# Altium PCB Alsoran PCB-20180114-version2.PcbDoc (part 4 of 4)
Units mil, origin at the board's own origin, x right, y up, seen from the top; angles counter-clockwise.
Board outline 15223.67 x 4104.31 mil, 2 copper layers (Top Layer, Bottom Layer); 293 components, 222 nets, 1561 pads, 240 vias.
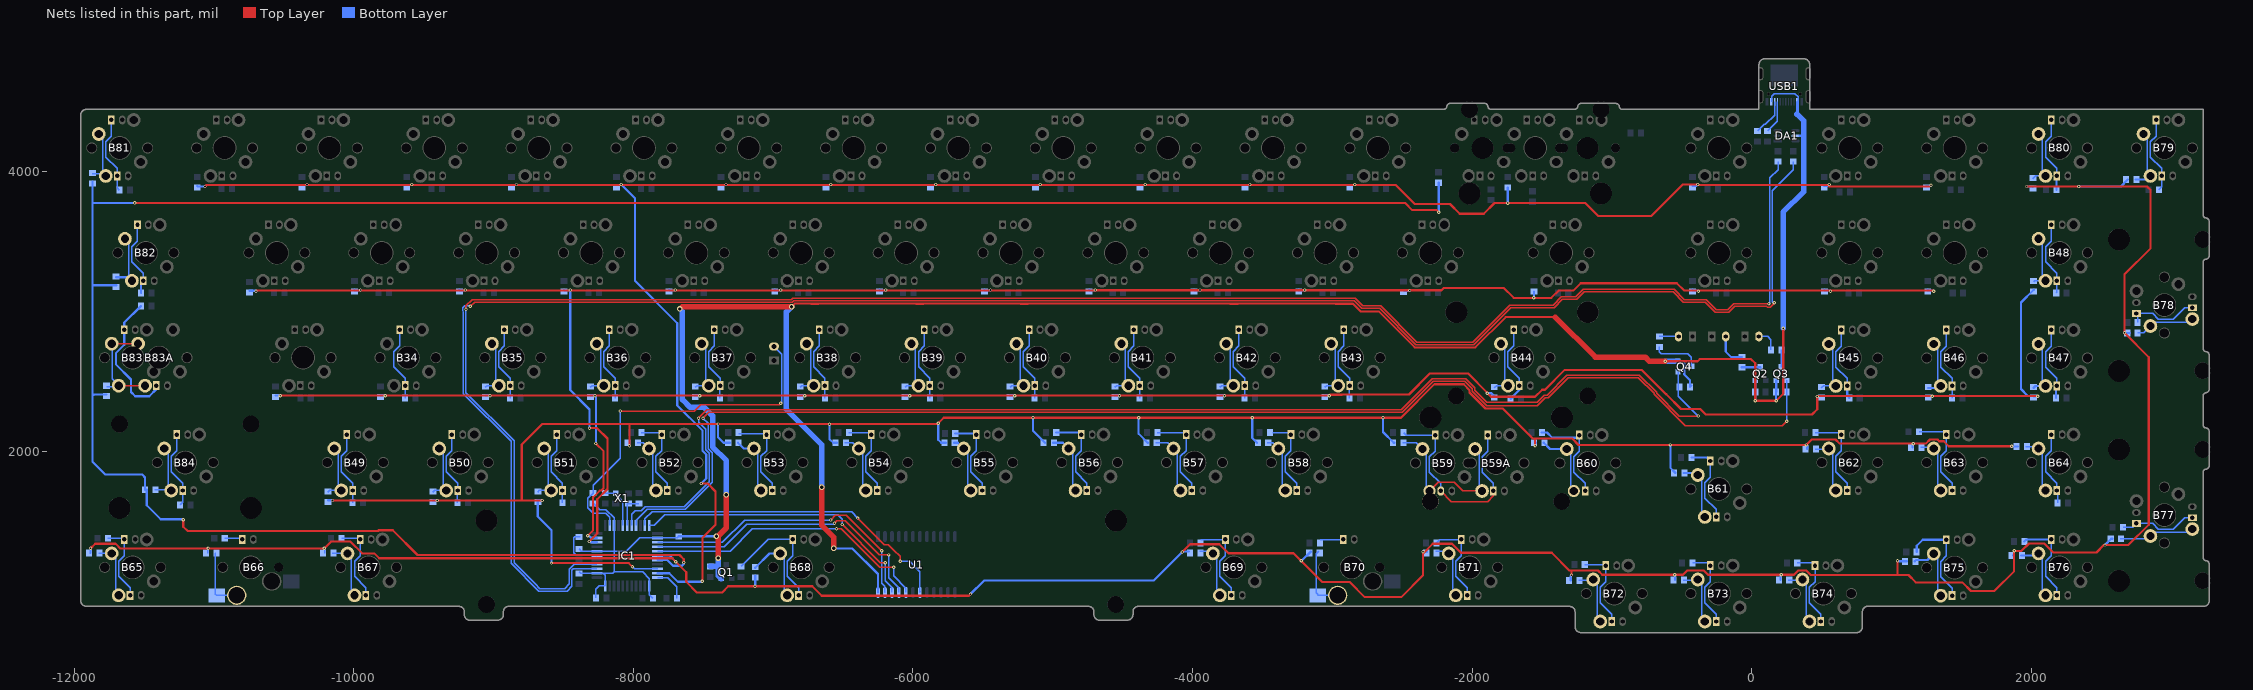
[diagram p4: the nets of this part, all layers, seen from the top]

## Via types
v1: diameter 23.62, hole 11.81, Top Layer to Bottom Layer, 150 vias
v2: diameter 27.56, hole 19.68, Top Layer to Bottom Layer, 63 vias
v3: diameter 39.37, hole 23.62, Top Layer to Bottom Layer, 12 vias
v4: diameter 24.41, hole 11.81, Top Layer to Bottom Layer, tented both sides, 10 vias
v5: diameter 23.62, hole 11.81, Top Layer to Bottom Layer, tented both sides, 3 vias
v6: diameter 31.5, hole 19.68, Top Layer to Bottom Layer, 2 vias

## Nets (pads, with @x,y where several pads share a name; then routed paths per layer and width w, separated by ;. In a path a pad name is that pad's centre, name@x,y a point inside that pad or via, vN(x,y) a via of type N, cw(c..) or ccw(c..) an arc to the next point about the centre after c; other vN are vias at no path point) (continued)
NetB34_3: B34.3 R42.2 | length 540.2
  Bottom Layer w10: B34.3@-9671.81,2869.29 -9671.81,2752.99 -9712.2,2712.6 -9712.2,2604.33 -9630.75,2522.87 B34.3@-9630.75,2469.29 -9631.5,2468.54 R42.2@-9631.5,2379.92
NetB35_2: B35.2 D35.1 | length 422
  Bottom Layer w10: D35.1@-9057.52,2456.69 -9044.92,2469.29 B35.2@-8961.42,2469.29 -8983.46,2491.34 -8983.46,2741.34 B35.2@-9011.42,2769.29
NetB35_3: B35.3 R43.2 | length 540.2
  Bottom Layer w10: B35.3@-8921.42,2869.29 -8921.42,2752.99 -8961.81,2712.6 -8961.81,2604.33 -8880.35,2522.87 B35.3@-8880.35,2469.29 -8881.1,2468.54 R43.2@-8881.1,2379.92
NetB36_2: B36.2 D36.1 | length 422
  Bottom Layer w10: D36.1@-8307.13,2456.69 -8294.53,2469.29 B36.2@-8211.02,2469.29 -8233.07,2491.34 -8233.07,2741.34 B36.2@-8261.02,2769.29
NetB36_3: B36.3 R44.2 | length 540.2
  Bottom Layer w10: B36.3@-8171.02,2869.29 -8171.02,2752.99 -8211.42,2712.6 -8211.42,2604.33 -8129.96,2522.87 B36.3@-8129.96,2469.29 -8130.71,2468.54 R44.2@-8130.71,2379.92
NetB37_2: B37.2 D37.1 | length 422
  Bottom Layer w10: D37.1@-7556.73,2456.69 -7544.14,2469.29 B37.2@-7460.63,2469.29 -7482.68,2491.34 -7482.68,2741.34 B37.2@-7510.63,2769.29
NetB37_3: B37.3 R45.2 | length 540.2
  Bottom Layer w10: B37.3@-7420.63,2869.29 -7420.63,2752.99 -7461.02,2712.6 -7461.02,2604.33 -7379.57,2522.87 B37.3@-7379.57,2469.29 -7380.31,2468.54 R45.2@-7380.31,2379.92
NetB38_2: B38.2 D38.1 | length 422
  Bottom Layer w10: D38.1@-6806.34,2456.69 -6793.74,2469.29 B38.2@-6710.24,2469.29 -6732.28,2491.34 -6732.28,2741.34 B38.2@-6760.24,2769.29
NetB38_3: B38.3 R46.2 | length 540.2
  Bottom Layer w10: B38.3@-6670.24,2869.29 -6670.24,2752.99 -6710.63,2712.6 -6710.63,2604.33 -6629.17,2522.87 B38.3@-6629.17,2469.29 -6629.92,2468.54 R46.2@-6629.92,2379.92
NetB39_2: B39.2 D39.1 | length 422
  Bottom Layer w10: D39.1@-6055.95,2456.69 -6043.35,2469.29 B39.2@-5959.84,2469.29 -5981.89,2491.34 -5981.89,2741.34 B39.2@-6009.84,2769.29
NetB39_3: B39.3 R47.2 | length 540.2
  Bottom Layer w10: B39.3@-5919.84,2869.29 -5919.84,2752.99 -5960.24,2712.6 -5960.24,2604.33 -5878.78,2522.87 B39.3@-5878.78,2469.29 -5879.53,2468.54 R47.2@-5879.53,2379.92
NetB40_2: B40.2 D40.1 | length 422
  Bottom Layer w10: D40.1@-5305.55,2456.69 -5292.95,2469.29 B40.2@-5209.45,2469.29 -5231.5,2491.34 -5231.5,2741.34 B40.2@-5259.45,2769.29
NetB40_3: B40.3 R48.2 | length 540.2
  Bottom Layer w10: B40.3@-5169.45,2869.29 -5169.45,2752.99 -5209.84,2712.6 -5209.84,2604.33 -5128.39,2522.87 B40.3@-5128.39,2469.29 -5129.13,2468.54 R48.2@-5129.13,2379.92
NetB41_2: B41.2 D41.1 | length 422
  Bottom Layer w10: D41.1@-4555.16,2456.69 -4542.56,2469.29 B41.2@-4459.06,2469.29 -4481.1,2491.34 -4481.1,2741.34 B41.2@-4509.06,2769.29
NetB41_3: B41.3 R49.2 | length 540.2
  Bottom Layer w10: B41.3@-4419.06,2869.29 -4419.06,2752.99 -4459.45,2712.6 -4459.45,2604.33 -4377.99,2522.87 B41.3@-4377.99,2469.29 -4378.74,2468.54 R49.2@-4378.74,2379.92
NetB42_2: B42.2 D42.1 | length 422
  Bottom Layer w10: D42.1@-3804.77,2456.69 -3792.17,2469.29 B42.2@-3708.66,2469.29 -3730.71,2491.34 -3730.71,2741.34 B42.2@-3758.66,2769.29
NetB42_3: B42.3 R50.2 | length 540.2
  Bottom Layer w10: B42.3@-3668.66,2869.29 -3668.66,2752.99 -3709.06,2712.6 -3709.06,2604.33 -3627.6,2522.87 B42.3@-3627.6,2469.29 -3628.35,2468.54 R50.2@-3628.35,2379.92
NetB43_2: B43.2 D43.1 | length 422
  Bottom Layer w10: D43.1@-3054.37,2456.69 -3041.77,2469.29 B43.2@-2958.27,2469.29 -2980.31,2491.34 -2980.31,2741.34 B43.2@-3008.27,2769.29
NetB43_3: B43.3 R51.2 | length 540.2
  Bottom Layer w10: B43.3@-2918.27,2869.29 -2918.27,2752.99 -2958.66,2712.6 -2958.66,2604.33 -2877.2,2522.87 B43.3@-2877.2,2469.29 -2877.95,2468.54 R51.2@-2877.95,2379.92
NetB44_2: B44.2 D44.1 | length 426.4
  Bottom Layer w10: D44.1@-1842.52,2452.76 -1825.98,2469.29 B44.2@-1743.7,2469.29 -1765.75,2491.34 -1765.75,2741.34 B44.2@-1793.7,2769.29
NetB44_3: B44.3 R52.2 | length 572.1
  Bottom Layer w10: B44.3@-1703.7,2869.29 -1703.7,2752.99 -1744.09,2712.6 -1744.09,2604.33 -1662.64,2522.87 B44.3@-1662.64,2469.29
  Bottom Layer w15.75: R52.2@-1726.38,2374.02 -1662.64,2437.76 B44.3@-1662.64,2469.29
NetB45_2: B45.2 D45.1 | length 429.5
  Bottom Layer w10: D45.1@498.03,2452.76 512.6,2467.32 B45.2@600.79,2467.32 578.74,2489.37 578.74,2739.37 B45.2@550.79,2767.32
NetB45_3: B45.3 R53.2 | length 542.1
  Bottom Layer w10: B45.3@640.79,2867.32 640.79,2751.02 600.39,2710.63 600.39,2602.36 681.85,2520.91 B45.3@681.85,2467.32
  Bottom Layer w15.75: B45.3@681.85,2467.32 681.85,2396.89 R53.2@696.85,2381.89
NetB46_2: B46.2 D46.1 | length 415.7
  Bottom Layer w10: B46.2@1300.79,2767.32 1328.74,2739.37 1328.74,2489.37 B46.2@1350.79,2467.32
  Bottom Layer w15.75: D46.1@1261.81,2452.76 1336.22,2452.76 B46.2@1350.79,2467.32
NetB46_3: B46.3 R54.2 | length 536.2
  Bottom Layer w10: B46.3@1390.79,2867.32 1390.79,2751.02 1350.39,2710.63 1350.39,2602.36 1431.85,2520.91 B46.3@1431.85,2467.32 1431.85,2382.64 R54.2@1431.1,2381.89
NetB47_2: B47.2 D47.1 | length 413.8
  Bottom Layer w10: B47.2@2050.79,2767.32 2078.74,2739.37 2078.74,2489.37 B47.2@2100.79,2467.32
  Bottom Layer w15.75: D47.1@2013.78,2452.76 2028.35,2467.32 B47.2@2100.79,2467.32
NetB47_3: B47.3 R55.2 | length 538.7
  Bottom Layer w10: B47.3@2140.79,2867.32 2140.79,2751.02 2100.39,2710.63 2100.39,2602.36 2181.85,2520.91 B47.3@2181.85,2467.32
  Bottom Layer w15.75: R55.2@2175.2,2381.89 2175.2,2460.67 B47.3@2181.85,2467.32
NetB48_2: B48.2 D48.1 | length 408.7
  Bottom Layer w10: D48.1@2015.75,3212.22 2022.82,3219.29 B48.2@2100.79,3219.29 2078.74,3241.34 2078.74,3491.34 B48.2@2050.79,3519.29
NetB48_3: B48.3 R56.2 | length 539.8
  Bottom Layer w10: B48.3@2140.79,3619.29 2140.79,3502.99 2100.39,3462.6 2100.39,3354.33 2181.85,3272.87 B48.3@2181.85,3219.29 2181.85,3136.58 R56.2@2177.17,3131.89
NetB49_2: B49.2 D49.1 | length 422
  Bottom Layer w10: D49.1@-10184.29,1706.69 -10171.69,1719.29 B49.2@-10088.19,1719.29 -10110.24,1741.34 -10110.24,1991.34 B49.2@-10138.19,2019.29
NetB49_3: B49.3 R57.2 | length 540.2
  Bottom Layer w10: B49.3@-10048.19,2119.29 -10048.19,2002.99 -10088.58,1962.6 -10088.58,1854.33 -10007.13,1772.87 B49.3@-10007.13,1719.29 -10007.87,1718.54 R57.2@-10007.87,1629.92
NetB50_2: B50.2 D50.1 | length 422
  Bottom Layer w10: D50.1@-9434.07,1706.69 -9421.48,1719.29 B50.2@-9337.97,1719.29 -9360.02,1741.34 -9360.02,1991.34 B50.2@-9387.97,2019.29
NetB50_3: B50.3 R58.2 | length 540.2
  Bottom Layer w10: B50.3@-9297.97,2119.29 -9297.97,2002.99 -9338.36,1962.6 -9338.36,1854.33 -9256.91,1772.87 B50.3@-9256.91,1719.29 -9257.66,1718.54 R58.2@-9257.66,1629.92
NetB51_2: B51.2 D51.1 | length 422
  Bottom Layer w10: D51.1@-8683.86,1706.69 -8671.26,1719.29 B51.2@-8587.75,1719.29 -8609.8,1741.34 -8609.8,1991.34 B51.2@-8637.75,2019.29
NetB51_3: B51.3 R59.2 | length 540.2
  Bottom Layer w10: B51.3@-8547.75,2119.29 -8547.75,2002.99 -8588.15,1962.6 -8588.15,1854.33 -8506.69,1772.87 B51.3@-8506.69,1719.29 -8507.44,1718.54 R59.2@-8507.44,1629.92
NetB52_2: B52.2 D52.1 | length 391.7
  Bottom Layer w10: D52.1@-7972.44,2061.02 -7929.27,2061.02 B52.2@-7887.53,2019.29 -7859.58,1991.34 B52.2@-7859.58,1741.34
NetB52_3: B52.3 R60.2 | length 601.9
  Bottom Layer w10: R60.2@-7942.91,2133.86 -7812.1,2133.86 B52.3@-7797.53,2119.29 -7797.53,2002.99 -7837.93,1962.6 -7837.93,1854.33 -7756.47,1772.87 B52.3@-7756.47,1719.29
NetB53_2: B53.2 D53.1 | length 381.9
  Bottom Layer w10: B53.2@-7109.36,1741.34 B53.2@-7109.36,1991.34
  Bottom Layer w15.75: D53.1@-7251.97,2061.02 -7210.24,2019.29 B53.2@-7137.31,2019.29
NetB53_3: B53.3 R61.2 | length 652
  Bottom Layer w10: R61.2@-7246.06,2125.98 -7054.01,2125.98 B53.3@-7047.31,2119.29 -7047.31,2002.99 -7087.71,1962.6 -7087.71,1854.33 -7006.25,1772.87 B53.3@-7006.25,1719.29
NetB54_2: B54.2 D54.1 | length 405.9
  Bottom Layer w10: D54.1@-6486.22,2061.02 -6428.83,2061.02 B54.2@-6387.1,2019.29 -6359.14,1991.34 B54.2@-6359.14,1741.34
NetB54_3: B54.3 R62.2 | length 619.1
  Bottom Layer w10: R62.2@-6458.66,2133.86 -6311.66,2133.86 B54.3@-6297.1,2119.29 -6297.1,2002.99 -6337.49,1962.6 -6337.49,1854.33 -6256.03,1772.87 B54.3@-6256.03,1719.29 B54.3@-6256.78,1718.54
NetB55_2: B55.2 D55.1 | length 376.6
  Bottom Layer w10: B55.2@-5636.88,2019.29 -5608.92,1991.34 B55.2@-5608.92,1741.34
  Bottom Layer w15.75: D55.1@-5706.69,2061.02 -5678.61,2061.02 B55.2@-5636.88,2019.29
NetB55_3: B55.3 R63.2 | length 705.7
  Bottom Layer w10: B55.3@-5546.88,2119.29 -5546.88,2002.99 -5587.27,1962.6 -5587.27,1854.33 -5505.81,1772.87 B55.3@-5505.81,1719.29
  Bottom Layer w15.75: R63.2@-5697.44,2125.98 B55.3@-5553.57,2125.98 ; -5655.51,2125.98 B55.3@-5553.57,2125.98 ; B55.3@-5546.88,2119.29 B55.3@-5553.57,2125.98
NetB56_2: B56.2 D56.1 | length 449.4
  Bottom Layer w10: B56.2@-4886.66,2019.29 -4858.71,1991.34 -4858.71,1741.34 B56.2@-4836.66,1719.29
  Bottom Layer w15.75: D56.1@-4998.03,2061.02 -4928.39,2061.02 B56.2@-4886.66,2019.29
NetB56_3: B56.3 R64.2 | length 634.7
  Bottom Layer w10: B56.3@-4796.66,2119.29 -4796.66,2002.99 -4837.05,1962.6 -4837.05,1854.33 -4755.6,1772.87 B56.3@-4755.6,1719.29
  Bottom Layer w15.75: R64.2@-4974.85,2133.86 -4811.23,2133.86 B56.3@-4796.66,2119.29
NetB57_2: B57.2 D57.1 | length 463.6
  Bottom Layer w10: D57.1@-4262.03,2061.02 -4178.17,2061.02 B57.2@-4136.44,2019.29 -4108.49,1991.34 -4108.49,1741.34 B57.2@-4086.44,1719.29
NetB57_3: B57.3 R65.2 | length 662
  Bottom Layer w10: R65.2@-4251.97,2133.86 -4061.01,2133.86 B57.3@-4046.44,2119.29 -4046.44,2002.99 -4086.83,1962.6 -4086.83,1854.33 -4005.38,1772.87 B57.3@-4005.38,1719.29
NetB58_2: B58.2 D58.1 | length 416.3
  Bottom Layer w10: D58.1@-3464.57,2061.02 -3427.95,2061.02 B58.2@-3386.22,2019.29 -3358.27,1991.34 -3358.27,1741.34 B58.2@-3336.22,1719.29
NetB58_3: B58.3 R66.2 | length 587.4
  Bottom Layer w10: R66.2@-3427.17,2133.86 -3310.79,2133.86 B58.3@-3296.22,2119.29 -3296.22,2002.99 -3336.62,1962.6 -3336.62,1854.33 -3255.16,1772.87 B58.3@-3255.16,1719.29
NetB59_2: B59.2 B59A.2 D59.1 pad.5@-2299.32,1640.8 | length 1230
  Top Layer w10: B59.2@-2305.41,1715.8 -2243.65,1777.56 -2127.95,1777.56 -2066.19,1715.8 B59A.2@-1929.32,1715.8
  Bottom Layer w10: D59.1@-2498.03,2061.02 -2400.64,2061.02 B59.2@-2355.41,2015.8 -2327.46,1987.84 -2327.46,1737.84 B59.2@-2305.41,1715.8 ; B59A.2@-1979.32,2015.8 -1951.37,1987.84 -1951.37,1737.84 B59A.2@-1929.32,1715.8
NetB59_3: B59.3 B59A.3 R67.2 | length 1592.1
  Top Layer w10: B59.3@-2224.35,1715.8 -2148.76,1640.2 -1889.32,1640.2 -1848.26,1681.27 B59A.3@-1848.26,1715.8
  Bottom Layer w10: R67.2@-2490.16,2133.86 -2472.09,2115.8 B59.3@-2265.41,2115.8 -2265.41,1999.5 -2305.81,1959.1 -2305.81,1850.83 -2224.35,1769.38 B59.3@-2224.35,1715.8 ; B59A.3@-1889.32,2115.8 -1889.32,1999.5 -1929.71,1959.1 -1929.71,1850.83 -1848.26,1769.38 B59A.3@-1848.26,1715.8
NetB60_2: B60.2 D60.1 | length 504.4
  Bottom Layer w10: B60.2@-1323.23,2015.8 -1295.28,1987.84 -1295.28,1737.84 B60.2@-1273.23,1715.8
  Bottom Layer w15.75: D60.1@-1488.19,2061.02 -1442.96,2015.8 B60.2@-1323.23,2015.8
NetB60_3: B60.3 R68.2 | length 742.7
  Bottom Layer w10: B60.3@-1233.23,2115.8 -1233.23,1999.5 -1273.62,1959.1 -1273.62,1850.83 -1192.17,1769.38 B60.3@-1192.17,1715.8
  Bottom Layer w15.75: R68.2@-1501.97,2133.86 -1464.57,2133.86 -1427.17,2096.46 -1252.57,2096.46 B60.3@-1233.23,2115.8
NetB61_2: B61.2 D61.1 | length 428.5
  Bottom Layer w10: B61.2@-386.22,1830.31 -358.27,1802.36 -358.27,1552.36 B61.2@-336.22,1530.31
  Bottom Layer w15.75: D61.1@-488.19,1844.49 -400.39,1844.49 B61.2@-386.22,1830.31
NetB61_3: B61.3 R69.2 | length 595.5
  Bottom Layer w10: B61.3@-296.22,1930.31 -296.22,1814.02 -336.61,1773.62 -336.61,1665.35 -255.16,1583.9 B61.3@-255.16,1530.31
  Bottom Layer w15.75: R69.2@-431.1,1954.72 -320.63,1954.72 B61.3@-296.22,1930.31
NetB62_2: B62.2 D62.1 | length 420.2
  Bottom Layer w10: D62.1@452.76,2015.75 547.24,2015.75 B62.2@550.79,2019.29 578.74,1991.34 578.74,1741.34 B62.2@600.79,1719.29
NetB62_3: B62.3 R70.2 | length 642.6
  Bottom Layer w10: R70.2@454.72,2133.86 626.22,2133.86 B62.3@640.79,2119.29 640.79,2002.99 600.39,1962.6 600.39,1854.33 681.85,1772.87 B62.3@681.85,1719.29
NetB63_2: B63.2 D63.1 | length 418.2
  Bottom Layer w10: D63.1@1206.69,2027.56 1292.52,2027.56 B63.2@1300.79,2019.29 1328.74,1991.34 1328.74,1741.34 B63.2@1350.79,1719.29
NetB63_3: B63.3 R71.2 | length 652.9
  Bottom Layer w10: R71.2@1196.85,2139.76 1370.31,2139.76 B63.3@1390.79,2119.29 1390.79,2002.99 1350.39,1962.6 1350.39,1854.33 1431.85,1772.87 B63.3@1431.85,1719.29
NetB64_2: B64.2 D64.1 | length 416.7
  Bottom Layer w10: D64.1@1960.63,2033.46 2036.61,2033.46 B64.2@2050.79,2019.29 2078.74,1991.34 2078.74,1741.34 B64.2@2100.79,1719.29
NetB64_3: B64.3 R72.2 | length 542
  Bottom Layer w10: B64.3@2140.79,2119.29 2140.79,2002.99 2100.39,1962.6 2100.39,1854.33 2181.85,1772.87 B64.3@2181.85,1719.29 2187.01,1714.13 R72.2@2187.01,1629.92
NetB65_2: B65.2 D65.1 | length 415.8
  Bottom Layer w10: D65.1@-11824.8,1271.65 -11733.07,1271.65 B65.2@-11730.71,1269.29 -11702.76,1241.34 -11702.76,991.34 B65.2@-11680.71,969.29
NetB65_3: B65.3 R73.2 | length 571.2
  Bottom Layer w10: R73.2@-11757.87,1377.95 -11649.37,1377.95 B65.3@-11640.71,1369.29 -11640.71,1252.99 -11681.1,1212.6 -11681.1,1104.33 -11599.65,1022.87 B65.3@-11599.65,969.29
NetB66_2: B66.2 D66.1 | length 449.9
  Bottom Layer w10: D66.1@-10988.19,1271.65 -10988.46,1271.38 -10988.46,978.62 B66.2@-10978.35,968.5 -10977.56,969.29 B66.2@-10836.22,969.29
NetB66_3: B66.3 R74.2 | length 129.6
  Bottom Layer w10: R74.2@-10922.24,1377.95 -10804.88,1377.95 B66.3@-10796.22,1369.29
NetB67_2: B67.2 D67.1 | length 429.6
  Bottom Layer w10: D67.1@-10151.57,1271.65 -10046.06,1271.65 B67.2@-10043.7,1269.29 -10015.75,1241.34 -10015.75,991.34 B67.2@-9993.7,969.29
NetB67_3: B67.3 R75.2 | length 587
  Bottom Layer w10: R75.2@-10086.61,1377.95 -9962.36,1377.95 B67.3@-9953.7,1369.29 -9953.7,1252.99 -9994.09,1212.6 -9994.09,1104.33 -9912.64,1022.87 B67.3@-9912.64,969.29
NetB68_2: B68.2 D68.1 | length 541.7
  Bottom Layer w10: B68.2@-6949.21,1269.29 -6921.26,1241.34 -6921.26,991.34 B68.2@-6899.21,969.29
  Bottom Layer w15.75: D68.1@-7127.95,1167.3 -7025.96,1269.29 B68.2@-6949.21,1269.29
NetB68_3: B68.3 R76.2 | length 899.7
  Bottom Layer w10: R76.2@-7228.59,1176.55 -7035.85,1369.29 B68.3@-6859.21,1369.29 -6859.21,1252.99 -6899.61,1212.6 -6899.61,1104.33 -6818.15,1022.87 B68.3@-6818.15,969.29
NetB69_2: B69.2 D69.1 | length 420.7
  Bottom Layer w10: D69.1@-3948.82,1283.46 -3868.9,1283.46 B69.2@-3854.72,1269.29 -3826.77,1241.34 -3826.77,991.34 B69.2@-3804.72,969.29
NetB69_3: B69.3 R77.2 | length 630
  Bottom Layer w10: R77.2@-3942.91,1366.14 -3767.87,1366.14 B69.3@-3764.72,1369.29 -3764.72,1252.99 -3805.12,1212.6 -3805.12,1104.33 -3723.66,1022.87 B69.3@-3723.66,969.29
NetB70_2: B70.2 D70.1 | length 469.1
  Bottom Layer w10: D70.1@-3096.46,1283.46 -3114.45,1265.47 -3114.45,988.46 -3104.33,978.35 B70.2@-3104.33,968.5 -2962.99,968.5 B70.2@-2962.2,969.29
NetB70_3: B70.3 R78.2 | length 167.7
  Bottom Layer w10: R78.2@-3088.58,1366.14 -2925.35,1366.14 B70.3@-2922.2,1369.29
NetB71_2: B71.2 D71.1 | length 418.7
  Bottom Layer w10: D71.1@-2259.84,1283.46 -2181.89,1283.46 B71.2@-2167.72,1269.29 -2139.76,1241.34 -2139.76,991.34 B71.2@-2117.72,969.29
NetB71_3: B71.3 R79.2 | length 742.1
  Bottom Layer w10: R79.2@-2255.91,1342.52 -2232.28,1366.14 -2110.23,1366.14 ; -2212.6,1366.14 -2110.23,1366.14 ; B71.3@-2036.65,969.29 -2036.65,1022.87 -2118.11,1104.33 -2118.11,1212.6 -2077.72,1252.99 B71.3@-2077.72,1369.29 -2080.87,1366.14 -2110.23,1366.14
NetB72_2: B72.2 D72.1 | length 426.9
  Bottom Layer w10: D72.1@-1238.19,1076.77 -1139.76,1076.77 B72.2@-1134.25,1082.28 -1106.3,1054.33 -1106.3,804.33 B72.2@-1084.25,782.28
NetB72_3: B72.3 R80.2 | length 603.9
  Bottom Layer w10: R80.2@-1194.88,1188.98 -1050.94,1188.98 B72.3@-1044.25,1182.28 -1044.25,1065.98 -1084.65,1025.59 -1084.65,917.32 -1003.19,835.87 B72.3@-1003.19,782.28
NetB73_2: B73.2 D73.1 | length 428.1
  Bottom Layer w10: D73.1@-492.13,1078.74 -389.76,1078.74 B73.2@-386.22,1082.28 ; B73.2@-386.22,1098.5 B73.2@-358.27,1070.55 ; B73.2@-358.27,1054.33 -358.27,804.33 B73.2@-336.22,782.28
NetB73_3: B73.3 R81.2 | length 585.1
  Bottom Layer w10: R81.2@-423.23,1200.79 -314.72,1200.79 B73.3@-296.22,1182.28 -296.22,1065.98 -336.61,1025.59 -336.61,917.32 -255.16,835.87 B73.3@-255.16,782.28
NetB74_2: B74.2 D74.1 | length 422.2
  Bottom Layer w10: D74.1@261.81,1078.74 358.27,1078.74 B74.2@361.81,1082.28 389.76,1054.33 389.76,804.33 B74.2@411.81,782.28
NetB74_3: B74.3 R82.2 | length 585.1
  Bottom Layer w10: R82.2@324.8,1200.79 433.31,1200.79 B74.3@451.81,1182.28 451.81,1065.98 411.42,1025.59 411.42,917.32 492.87,835.87 B74.3@492.87,782.28
NetB75_2: B75.2 D75.1 | length 478.8
  Bottom Layer w10: B75.2@1300.79,1267.32 1328.74,1239.37 1328.74,989.37 B75.2@1350.79,967.32
  Bottom Layer w15.75: D75.1@1165.35,1212.6 1175.2,1222.44 1255.91,1222.44 B75.2@1300.79,1267.32
NetB75_3: B75.3 R83.2 | length 725
  Bottom Layer w10: B75.3@1390.79,1367.32 1390.79,1251.02 1350.39,1210.63 1350.39,1102.36 1431.85,1020.91 B75.3@1431.85,967.32
  Bottom Layer w15.75: R83.2@1179.13,1279.53 1179.13,1324.8 1221.65,1367.32 B75.3@1390.79,1367.32
NetB76_2: B76.2 D76.1 | length 452.7
  Bottom Layer w10: B76.2@2050.79,1269.29 2078.74,1241.34 2078.74,991.34 B76.2@2100.79,969.29
  Bottom Layer w15.75: D76.1@1925.2,1253.94 2035.43,1253.94 B76.2@2050.79,1269.29
NetB76_3: B76.3 R84.2 | length 648.6
  Bottom Layer w10: B76.3@2140.79,1369.29 2140.79,1252.99 2100.39,1212.6 2100.39,1104.33 2181.85,1022.87 B76.3@2181.85,969.29
  Bottom Layer w15.75: R84.2@1948.82,1354.33 1963.78,1369.29 B76.3@2140.79,1369.29
NetB77_2: B77.2 D77.1 | length 543.7
  Bottom Layer w10: D77.1@2635.83,1374.02 2831.5,1374.02 B77.2@2850.79,1393.31 2878.74,1421.26 3128.74,1421.26 B77.2@3150.79,1443.31
NetB77_3: B77.3 R85.2 | length 556.8
  Bottom Layer w10: R85.2@2655.51,1456.69 2724.17,1456.69 B77.3@2750.79,1483.31 2867.09,1483.31 2907.48,1442.91 3015.75,1442.91 3097.2,1524.37 B77.3@3150.79,1524.37
NetB78_2: B78.2 D78.1 | length 429.9
  Bottom Layer w10: D78.1@2761.81,2846.46 2801.97,2846.46 B78.2@2850.79,2895.28 2878.74,2923.23 3128.74,2923.23 B78.2@3150.79,2945.28
NetB78_3: B78.3 R86.2 | length 518.2
  Bottom Layer w10: R86.2@2759.84,2921.26 2759.84,2976.22 B78.3@2750.79,2985.28 2867.09,2985.28 2907.48,2944.88 3015.75,2944.88 3097.2,3026.34 B78.3@3150.79,3026.34
NetB79_2: B79.2 D79.1 | length 436.4
  Bottom Layer w10: B79.2@2800.79,4269.29 2828.74,4241.34 2828.74,3991.34 B79.2@2850.79,3969.29
  Bottom Layer w15.75: D79.1@2746.06,3942.91 2824.41,3942.91 B79.2@2850.79,3969.29
NetB79_3: B79.3 R87.2 | length 558.1
  Bottom Layer w10: B79.3@2890.79,4369.29 2890.79,4252.99 2850.39,4212.6 2850.39,4104.33 2931.85,4022.87 B79.3@2931.85,3969.29 2931.85,3890.51 R87.2@2911.42,3870.08
NetB80_2: B80.2 D80.1 | length 420.1
  Bottom Layer w10: D80.1@2009.84,3948.82 2030.31,3969.29 B80.2@2100.79,3969.29 2078.74,3991.34 2078.74,4241.34 B80.2@2050.79,4269.29
NetB80_3: B80.3 R88.2 | length 550.8
  Bottom Layer w10: B80.3@2140.79,4369.29 2140.79,4252.99 2100.39,4212.6 2100.39,4104.33 2181.85,4022.87 B80.3@2181.85,3969.29
  Bottom Layer w15.75: R88.2@2179.13,3870.08 2179.13,3966.57 B80.3@2181.85,3969.29
NetB81_2: B81.2 D81.1 | length 421.8
  Bottom Layer w10: D81.1@-11868.11,3984.25 -11788.19,3984.25 B81.2@-11773.23,3969.29 -11795.28,3991.34 -11795.28,4241.34 B81.2@-11823.23,4269.29
NetB81_3: B81.3 R89.2 | length 558.7
  Bottom Layer w10: B81.3@-11733.23,4369.29 -11733.23,4252.99 -11773.62,4212.6 -11773.62,4104.33 -11692.17,4022.87 B81.3@-11692.17,3969.29 -11692.17,3885.08 R89.2@-11675.2,3868.11
NetB82_2: B82.2 D82.1 | length 412.4
  Bottom Layer w10: B82.2@-11636.22,3519.29 -11608.27,3491.34 B82.2@-11608.27,3241.34
  Bottom Layer w15.75: D82.1@-11698.82,3244.09 -11611.02,3244.09 B82.2@-11586.22,3219.29
NetB82_3: B82.3 R90.2 | length 544.7
  Bottom Layer w10: B82.3@-11546.22,3619.29 -11546.22,3502.99 -11586.61,3462.6 -11586.61,3354.33 -11505.16,3272.87 B82.3@-11505.16,3219.29
  Bottom Layer w15.75: R90.2@-11521.65,3131.89 -11521.27,3132.27 -11521.27,3203.18 B82.3@-11505.16,3219.29
NetB83_2: B83.2 B83A.2 D83.1 | length 816.8
  Top Layer w10: B83.2@-11730.71,2769.29 B83A.2@-11541.73,2769.29 ; B83.2@-11680.71,2469.29 B83A.2@-11491.73,2469.29
  Bottom Layer w10: D83.1@-11767.72,2462.6 B83.2@-11649.61,2462.6 ; B83.2@-11730.71,2769.29 -11728.46,2767.05 -11728.46,2517.05 B83.2@-11680.71,2469.29
NetB83_3: B83.3 B83A.3 R91.2 | length 974.4
  Bottom Layer w15.75: R91.2@-11521.65,3039.37 -11640.71,2920.31 B83.3@-11640.71,2869.29 -11640.71,2760.87 -11700.79,2700.79 -11700.79,2622.05 -11592.52,2513.78 -11592.52,2423.23 -11562.99,2393.7 -11462.6,2393.7 -11410.67,2445.63 B83A.3@-11410.67,2469.29
NetB84_2: B84.2 D84.1 | length 410.2
  Bottom Layer w10: D84.1@-11423.23,1724.41 -11309.84,1724.41 B84.2@-11304.72,1719.29 ; B84.2@-11354.72,2019.29 -11326.77,1991.34 B84.2@-11326.77,1741.34
NetB84_3: B84.3 R92.2 | length 561.3
  Bottom Layer w10: B84.3@-11264.72,2119.29 -11264.72,2002.99 -11305.12,1962.6 -11305.12,1854.33 -11223.66,1772.87 B84.3@-11223.66,1719.29 -11223.66,1634.61 R92.2@-11242.13,1616.14
NetC6_2: C6.2 IC1.16 X1.1 | length 325
  Bottom Layer w10: C6.2@-8200.79,1700.82 -8128.35,1700.82 X1.1@-8125.98,1698.45 -8125.98,1693.04 -8087.52,1654.57 -8087.52,1646.57 -8074.8,1633.86 IC1.16@-8074.8,1470.47
NetC7_2: C7.2 IC1.17 X1.3 | length 236.2
  Bottom Layer w10: IC1.17@-8043.31,1470.47 -8043.31,1619.71 X1.3@-8035.43,1627.59 -8033.07,1625.23 C7.2@-7960.63,1625.23
NetC8_2: C8.2 IC1.6 | length 331
  Bottom Layer w10: C8.2@-8377.95,1387.8 C8.2@-8387.8,1387.8 -8419.29,1387.8 -8425.28,1381.81 -8425.28,1274.59 -8411.99,1261.3 -8267.2,1261.3 IC1.6@-8259.84,1253.94
NetCapsLED1_1: CapsLED1.1 R5.2 | length 239.3
  Bottom Layer w15: CapsLED1.1@-186.92,2820.87 -186.92,2712.22 -150.18,2675.48 R5.2@-71.5,2675.48
NetIC1_3: IC1.3 R93.2 | length 13699.2
  Top Layer w10: v1(-9165.35,3037.4) -9135.5,3067.26 -6863.13,3067.26 -6853.91,3076.47 -6721.02,3076.47 -6720.1,3075.55 -6683.21,3075.55 -6682.29,3076.47 -5971.53,3076.47 -5970.61,3075.55 -5933.72,3075.55 -5932.8,3076.47 -5222.05,3076.47 -5221.12,3075.55 -5184.24,3075.55 -5183.31,3076.47 -3723.07,3076.47 -3722.15,3075.55 -3685.26,3075.55 -3684.33,3076.47 -2970.15,3076.47 -2969.23,3075.55 -2844.52,3075.55 -2790.06,3021.09 -2660.87,3021.09 -2402.65,2762.87 -1988.18,2762.87 -1723.05,3028 -1414.7,3028 -1356.3,3086.4 -1252.4,3086.4 -1198.84,3139.96 -561.96,3139.96 -489.26,3067.26 -332.96,3067.26 -261.61,2995.91 -163.86,2995.91 -122.52,3037.24 105.01,3037.24 111.82,3030.43 132.27,3030.43 159.45,3057.6 v1(159.45,3061.02)
  Bottom Layer w10: v1(-9165.35,3037.4) -9168.39,3040.43 -9207.08,3040.43 -9221.54,3025.97 -9221.54,3005.52 -9214.72,2998.71 -9214.72,2411.57 -8874.02,2070.87 -8874.02,1197.48 -8676.38,999.84 -8472.6,999.84 -8438.98,1033.46 -8438.98,1149.52 -8429.96,1158.54 -8260.75,1158.54 IC1.3@-8259.84,1159.45 ; v1(159.45,3061.02) 153.7,3061.02 145.83,3068.9 145.83,3864.29 296.26,4014.72 R93.2@296.26,4070.87 296.26,4043.27
NetIC1_4: IC1.4 R94.2 | length 13576.1
  Top Layer w10: v1(-9196.85,3015.75) -9196.85,3040.82 -9152.54,3085.13 -6870.54,3085.13 -6861.32,3094.35 -6713.62,3094.35 -6712.7,3093.43 -6690.62,3093.43 -6689.69,3094.35 -5964.13,3094.35 -5963.21,3093.43 -5941.13,3093.43 -5940.2,3094.35 -5214.64,3094.35 -5213.72,3093.43 -5191.64,3093.43 -5190.72,3094.35 -3715.66,3094.35 -3714.74,3093.43 -3692.66,3093.43 -3691.74,3094.35 -2962.75,3094.35 -2961.83,3093.43 -2837.11,3093.43 -2782.66,3038.97 -2653.47,3038.97 -2395.25,2780.75 -1995.58,2780.75 -1730.45,3045.87 -1422.1,3045.87 -1363.7,3104.27 -1259.8,3104.27 -1206.25,3157.83 -554.55,3157.83 -481.85,3085.13 -325.55,3085.13 -254.2,3013.78 -171.26,3013.78 -129.93,3055.11 v1(122.05,3055.11)
  Bottom Layer w10: v1(-9196.85,3015.75) -9196.85,2418.98 -8852.36,2074.49 -8852.36,1201.1 -8702.31,1051.04 ; -8691.77,1040.51 -8702.31,1051.04 ; IC1.4@-8259.84,1190.95 -8422.83,1190.95 -8456.85,1156.93 -8456.85,1052.99 -8491.97,1017.87 -8660.95,1017.87 -8661.1,1017.72 -8668.98,1017.72 -8702.31,1051.04 ; v1(122.05,3055.11) 127.95,3061.02 127.95,3954.68 187.99,4014.72 R94.2@187.99,4070.87 187.99,4043.27
NetIC1_13: IC1.13 R40.1 S1.2 | length 2633.1
  Top Layer w10: v1(-8092.52,2287.4) -7562.99,2287.4 -7517.72,2332.68 -6954.72,2332.68 v1(-6944.88,2342.52)
  Bottom Layer w10: IC1.13@-8169.29,1470.47 -8169.29,1529.53 -8196.85,1557.09 -8285.43,1557.09 -8324.88,1596.54 -8324.88,1662.55 R40.1@-8287.4,1700.03 -8287.4,1756.58 -8092.52,1951.46 v1(-8092.52,2287.4) ; S1.2@-6994.09,2749.61 -6938.07,2693.58 -6938.07,2349.33 v1(-6944.88,2342.52)
NetIC1_21: IC1.21 U1.18 | length 2419.4
  Top Layer w10: v1(-6393.92,1521.88) -6204.42,1332.37 -6175.87,1332.37 -6136.37,1292.87 ; -6158.46,1314.96 -6136.37,1292.87 ; v1(-6091.54,1212.6) -6091.54,1248.03 -6136.37,1292.87
  Bottom Layer w10: IC1.21@-7917.32,1470.47 -7917.32,1515.75 -7866.3,1566.77 -6438.82,1566.77 v1(-6393.92,1521.88) ; v1(-6091.54,1212.6) -6023.62,1212.6 -5950,1138.98 U1.18@-5950,989.76 U1.18@-5944.88,994.88
NetIC1_22: IC1.22 U1.22 | length 2115.5
  Top Layer w10: v1(-6505.91,1476.38) -6232.28,1202.76 v1(-6197.83,1202.76)
  Bottom Layer w10: IC1.22@-7885.83,1470.47 -7850.39,1470.47 -7775.59,1545.28 -6537.56,1545.28 -6505.91,1513.62 v1(-6505.91,1476.38) ; v1(-6197.83,1202.76) -6197.83,1073.82 -6150,1025.98 U1.22@-6150,989.76
NetIC1_25: IC1.25 U1.23 | length 2098
  Top Layer w10: v1(-6588.58,1507.87) -6555.12,1541.34 -6476.38,1541.34 v1(-6223.68,1288.64)
  Bottom Layer w10: IC1.25@-7826.77,1348.43 -7362.2,1348.43 -7202.76,1507.87 v1(-6588.58,1507.87) ; v1(-6223.68,1288.64) -6223.68,1057.34 -6200,1033.66 U1.23@-6200,989.76 U1.23@-6198.82,990.94
NetIC1_26: IC1.26 U1.21 | length 2130.2
  Top Layer w10: v1(-6561.02,1484.25) -6543.89,1501.38 -6483.66,1501.38 -6240.84,1258.56 v1(-6172.24,1258.56)
  Bottom Layer w10: IC1.26@-7826.77,1316.93 -7348.42,1316.93 -7187.01,1478.35 -6566.93,1478.35 v1(-6561.02,1484.25) ; v1(-6172.24,1258.56) -6172.24,1094.49 -6100,1022.24 U1.21@-6100,989.76
NetIC1_27: IC1.27 U1.20 | length 2091.3
  Top Layer w10: v1(-6547.24,1444.88) -6511.81,1444.88 -6238.19,1171.26 v1(-6136.81,1171.26)
  Bottom Layer w10: IC1.27@-7826.77,1285.43 -7307.09,1285.43 -7147.64,1444.88 v1(-6547.24,1444.88) ; v1(-6136.81,1171.26) -6136.81,1108.27 -6050,1021.46 U1.20@-6050,989.76 U1.20@-6053.15,992.91
NetIC1_33: IC1.33 R95.2 | length 247.4
  Bottom Layer w10: IC1.33@-7826.77,1096.46 -7753.94,1096.46 -7688.98,1031.5 R95.2@-7688.98,948.82
NetNumLED1_1: NumLED1.1 R7.2 | length 137
  Bottom Layer w10: R7.2@-661.1,2820.87 NumLED1.1@-524.13,2820.87
NetQ2_3: Q2.3 R5.1 | length 133.1
  Bottom Layer w15.75: R5.1@-71.5,2600.68 Q2.3@61.6,2600.68
NetQ3_3: Q3.3 R6.1 | length 124.1
  Bottom Layer w10: Q3.3@211,2600.68 R6.1@211,2724.8
NetQ4_3: Q4.3 R7.1 | length 345.5
  Bottom Layer w10: R7.1@-661.1,2746.06 -661.1,2710.6 -648.3,2697.8 -458.3,2697.8 -433.16,2672.66 Q4.3@-433.16,2606.24
NetR6_2: R6.2 ScorllLED1.1 | length 168.5
  Bottom Layer w10: ScorllLED1.1@50.28,2820.87 113.23,2820.87 136.2,2797.9 R6.2@136.2,2724.8
NetRA1_2: RA1.2 USB1.B8 | length 265
  Bottom Layer w10: RA1.2@41.34,4291.73 87.12,4337.51 97.7,4337.51 162.94,4402.75 USB1.B8@162.94,4500.13
NetRA2_2: RA2.2 USB1.A5 | length 237.2
  Bottom Layer w10: RA2.2@113.19,4291.73 182.62,4361.17 USB1.A5@182.62,4500.13
"NUM LOCK": IC1.18 Q4.1 R4.1 | length 9140.5
  Top Layer w10: v1(-7533.46,2236.22) -7533.46,2239.63 -7476.17,2296.93 -2507.39,2296.93 -2286.7,2517.62 -2045.2,2517.62 -1980.83,2453.25 -1980.83,2435.95 -1895.88,2351 -1534.32,2351 -1483.55,2401.78 -1463.74,2401.78 -1322.2,2543.32 -804.6,2543.32 -681.85,2420.57 -681.85,2416.1 -517.72,2251.97 v1(-383.86,2251.97)
  Bottom Layer w10: IC1.18@-8011.81,1470.47 -8011.81,1549.21 -7985.97,1575.05 -7943.16,1575.05 -7913.88,1604.33 -7635.83,1604.33 -7457.6,1782.56 -7457.6,1984.7 -7483.5,2010.61 -7483.5,2158.7 -7533.46,2208.66 v1(-7533.46,2236.22) ; Q4.1@-526.94,2568.24 -526.94,2395.06 v1(-383.86,2251.97)
ROW1: D1.2 D2.2 D3.2 D4.2 D5.2 D6.2 D7.2 D8.2 D9.2 D10.2 D11.2 D12.2 D13.2 D14.2 D15.2 D16.2 IC1.32 | length 16456
  Top Layer w15.75: v1(-11062.99,3893.7) -11053.15,3903.54 v1@-10337.93,3903.54 ; v1(-10333.99,3907.48) v1@-10337.93,3903.54 ; v1(-9584.65,3907.48) v1@-9588.58,3903.54 ; v1(-8835.3,3907.48) v1@-8839.24,3903.54 ; v1(-8085.96,3907.48) v1@-8089.89,3903.54 ; v1(-7513.78,1769.69) -7468.5,1769.69 -7411.42,1712.6 -7411.42,1474.41 -7505.91,1379.92 v1(-7505.91,1070.87) ; v1(-7336.61,3907.48) v1@-7340.55,3903.54 ; v1(-6587.27,3907.48) v1@-6591.21,3903.54 ; v1(-5837.93,3907.48) v1@-5841.86,3903.54 ; v1(-5088.58,3907.48) v1@-5092.52,3903.54 ; v1(-4339.24,3907.48) v1@-4343.18,3903.54 ; v1(-3589.9,3907.48) v1@-3593.83,3903.54 ; v1(-2840.55,3907.48) v1@-2844.49,3903.54 ; v1@-387.79,3904.34 v1@550.01,3904.34 ; v1(-387.79,3907.48) -494.33,3907.48 -719.88,3681.92 -1098.41,3681.92 -1191.49,3775 v4(-1746.06,3775) -1840.31,3775 -1917.31,3698 -2089,3698 -2159.13,3768.13 -2410.53,3768.13 -2545.94,3903.54 v1@-2844.49,3903.54 ; v1@549.21,3903.54 v1@550.01,3904.34 ; 553.15,3892.46 1270.42,3892.46 ; v1(553.15,3907.48) v1@550.01,3904.34 ; v1@-10337.93,3903.54 v1@-9588.58,3903.54 ; v1@-9588.58,3903.54 v1@-8839.24,3903.54 ; v1@-8839.24,3903.54 v1@-8089.89,3903.54 ; v1@-8089.89,3903.54 v1@-7340.55,3903.54 ; v1@-7340.55,3903.54 v1@-6591.21,3903.54 ; v1@-6591.21,3903.54 v1@-5841.86,3903.54 ; v1@-5841.86,3903.54 v1@-5092.52,3903.54 ; v1@-5092.52,3903.54 v1@-4343.18,3903.54 ; v1@-4343.18,3903.54 v1@-3593.83,3903.54 ; v1@-3593.83,3903.54 v1@-2844.49,3903.54
  Bottom Layer w15.75: D1.2@-11118.77,3897.64 -11114.83,3893.7 v1(-11062.99,3893.7) ; v1(-8085.96,3907.48) -7988.19,3809.71 -7988.19,3218.5 -7685.04,2915.35 -7685.04,2326.77 -7504.25,2145.98 -7504.25,2002.01 -7478.35,1976.11 -7478.35,1805.12 v1(-7513.78,1769.69) ; IC1.32@-7826.77,1127.95 -7742.13,1127.95 -7681.1,1066.93 -7509.84,1066.93 v1(-7505.91,1070.87) ; v4(-1746.06,3775) D13.2@-1746.06,3885.83 ; D14.2@-423.23,3897.64 -397.64,3897.64 ; D15.2@517.72,3897.64 543.31,3897.64 ; D16.2@1248.03,3897.64 v1@1275.59,3897.64
  other v1: 1281.5,3903.54
ROW2: D17.2 D18.2 D19.2 D20.2 D21.2 D22.2 D23.2 D24.2 D25.2 D26.2 D27.2 D28.2 D29.2 D30.2 D31.2 D32.2 IC1.9 | length 14789.3
  Top Layer w15.75: v1(-10698.82,3143.7) -10692.91,3149.61 v1@-4696.26,3149.61 ; v5(-8314.96,1354.33) -8257.87,1411.42 -8257.87,1657.04 -8185.04,1729.88 -8185.04,2090.55 -8259.84,2165.35 v1(-8312.99,2165.35) ; v1(-4696.26,3153.54) -4694.29,3151.57 -2219.13,3151.57 -2202.2,3168.5 -1775.53,3168.5 -1703.8,3096.78 v1(-1558.98,3096.78) -1433.95,3096.78 -1382.08,3148.64 -1278.18,3148.64 -1224.63,3202.2 -536.17,3202.2 -483.58,3149.61 v1@1295.28,3149.61
  Bottom Layer w15.75: D17.2@-10744.59,3147.64 -10702.76,3147.64 v1(-10698.82,3143.7) ; D18.2@-9993.86,3155.13 -9988.94,3150.21 v1@-9957.06,3150.21 ; D19.2@-9244.37,3155.13 -9239.45,3150.21 v1@-9207.58,3150.21 ; D20.2@-8494.88,3155.13 -8489.96,3150.21 v1@-8458.09,3150.21 ; v1(-8451.57,3153.54) -8451.57,2437.8 -8312.99,2299.21 v1(-8312.99,2165.35) ; v5(-8314.96,1354.33) -8311.02,1354.33 -8305.12,1348.43 IC1.9@-8259.84,1348.43 ; D21.2@-7743.42,3155.13 -7738.5,3150.21 v1@-7706.63,3150.21 ; D22.2@-6988.03,3155.13 -6983.11,3150.21 v1@-6951.24,3150.21 ; D23.2@-6238.54,3155.13 -6233.62,3150.21 v1@-6201.75,3150.21 ; D24.2@-5489.05,3155.13 -5484.13,3150.21 v1@-5452.26,3150.21 ; D25.2@-4739.56,3155.13 -4734.64,3150.21 v1@-4702.77,3150.21 ; D26.2@-3990.08,3155.13 -3985.15,3150.21 v1@-3953.28,3150.21 ; D27.2@-3240.59,3155.13 -3235.67,3150.21 v1@-3203.79,3150.21 ; D28.2@-2491.1,3151.2 -2486.18,3146.28 v1@-2454.3,3146.28 ; v1(-1558.98,3096.78) D29.2@-1558.98,3143.32 ; D30.2@-425.47,3155.13 -420.55,3150.21 v1@-388.68,3150.21 ; D31.2@519.69,3155.13 524.61,3150.21 v1@556.48,3150.21 ; D32.2@1257.87,3155.13 1262.8,3150.21 v1@1294.67,3150.21
  other v1: -382.17,3143.7 562.99,3143.7 1301.18,3143.7 -2447.79,3149.61 -9950.55,3153.54 -9201.06,3153.54 -7700.12,3153.54 -6944.72,3153.54 -6195.24,3153.54 -5445.75,3153.54 -3946.77,3153.54 -3197.28,3153.54
ROW3: D33.2 D34.2 D35.2 D36.2 D37.2 D38.2 D39.2 D40.2 D41.2 D42.2 D43.2 D44.2 D45.2 D46.2 D47.2 D48.2 IC1.10 | length 15425.5
  Top Layer w15.75: v1(-10525.59,2397.64) v1(-9775.2,2397.64) v1(-9024.8,2397.64) v1(-8274.41,2397.64) v1(-7524.02,2397.64) -7522.05,2399.61 -6775.59,2399.61 v1(-6773.62,2397.64) v1(-6023.23,2397.64) v1(-5272.83,2397.64) v1(-4522.44,2397.64) v1(-3772.05,2397.64) v1(-3021.65,2397.64) -3014.95,2404.34 -2931.37,2404.34 -2929.53,2406.18 -2452.76,2406.18 -2302.69,2556.24 -2029.2,2556.24 -1891.73,2418.77 v1(-1891.73,2415.35) -1866,2389.63 -1550.32,2389.63 -1499.55,2440.4 -1479.74,2440.4 -1338.2,2581.94 -788.6,2581.94 -614.61,2407.95 -612.68,2407.95 -506.97,2302.24 -369.88,2302.24 -330.43,2262.8 430.9,2262.8 468.5,2300.4 v1(468.5,2391.73) 472.44,2395.67 2043.31,2395.67 v1(2045.28,2393.7) ; v5(-8326.77,1395.67) -8287.4,1435.04 -8287.4,1671.26 -8240.16,1718.5 -8231.5,1718.5 -8212.16,1737.84 -8212.16,1999.56 v1(-8267.72,2055.12)
  Bottom Layer w15.75: D33.2@-10558.31,2399.61 v1@-10531.5,2399.61 ; D34.2@-9807.91,2399.61 v1@-9781.1,2399.61 ; D35.2@-9057.52,2399.61 v1@-9030.71,2399.61 ; v5(-8326.77,1395.67) -8317.32,1395.67 -8301.58,1379.92 IC1.10@-8259.84,1379.92 ; D36.2@-8307.13,2399.61 v1@-8280.31,2399.61 ; v1(-8274.41,2397.64) -8267.72,2390.94 v1(-8267.72,2055.12) ; D37.2@-7556.73,2399.61 v1@-7529.92,2399.61 ; D38.2@-6806.34,2399.61 v1@-6779.53,2399.61 ; D39.2@-6055.95,2399.61 v1@-6029.13,2399.61 ; D40.2@-5305.55,2399.61 v1@-5278.74,2399.61 ; D41.2@-4555.16,2399.61 v1@-4528.35,2399.61 ; D42.2@-3804.77,2399.61 v1@-3777.95,2399.61 ; D43.2@-3054.37,2399.61 v1@-3027.56,2399.61 ; v1(-1891.73,2415.35) -1862.2,2415.35 D44.2@-1842.52,2395.67 ; D48.2@2015.75,3155.13 1925.2,3064.58 1925.2,2444.88 1974.41,2395.67 2013.78,2395.67 2015.75,2393.7 v1(2045.28,2393.7)
  other v1: 1289.37,2393.7
ROW4: D49.2 D50.2 D51.2 D52.2 D53.2 D54.2 D55.2 D56.2 D57.2 D58.2 D59.2 D60.2 D61.2 D62.2 D63.2 D64.2 IC1.31 | length 16660.4
  Top Layer w10: -8031.7,1200.1 v5(-8006.4,1174.8)
  Top Layer w15.75: v1(-10151.57,1647.64) v1(-9401.36,1647.64) -8797.24,1647.64 ; v1(-8651.14,1647.64) -8797.24,1647.64 ; v1(-8585.7,1200.1) -8031.7,1200.1 ; v1(-8027.56,2039.37) -8027.56,2194.88 ; -5961.51,2194.88 -6381.88,2194.88 ; v1(-1550.2,2039.37) -1550.2,2085.63 -1545.28,2090.55 ; v1(1858.27,2035.43) 1408.5,2035.43 1371.89,2072.04 1339.89,2072.04 1327.69,2084.24 1273.88,2084.24 1243.99,2054.34 v1(1155.51,2054.34) 628.34,2054.34 598.45,2084.24 428.73,2084.24 v1(389.76,2045.28) v1(-582.68,2045.28) -1240.1,2045.28 -1285.38,2090.55 -1545.28,2090.55 ; -8797.24,1647.64 -8797.24,2048.78 -8651.14,2194.88 -8027.56,2194.88 ; -8027.56,2194.88 v1(-7393.7,2194.88) -6381.88,2194.88 ; -6381.88,2194.88 -5824.8,2194.88 v1(-5818.9,2200.79) -5779.53,2240.16 v1(-5141.73,2240.16) v1(-4385.83,2240.16) v1(-3572.83,2240.16) v1(-2637.8,2240.16) -2509.54,2240.16 -2270.7,2479 -2061.2,2479 -2019.45,2437.25 -2019.45,2419.95 -1904.81,2305.31 -1780.81,2305.31 -1566.05,2090.55 -1545.28,2090.55
  Bottom Layer w10: v5(-8006.4,1174.8) -7991.05,1159.45 IC1.31@-7826.77,1159.45
  Bottom Layer w15.75: D49.2@-10184.29,1649.61 v1@-10157.48,1649.61 ; D50.2@-9433.11,1649.61 v1@-9407.26,1649.61 ; D51.2@-8682.91,1637.8 -8682.91,1533.21 -8585.7,1436 v1(-8585.7,1200.1) ; D51.2@-8682.91,1649.61 D51.2@-8661.4,1649.61 ; v1(-7393.7,2194.88) -7393.7,2100.39 -7354.33,2061.02 D53.2@-7309.06,2061.02 ; v1(-6596.46,2192.91) -6596.46,2086.61 -6570.87,2061.02 D54.2@-6543.31,2061.02 ; v1(-5818.9,2200.79) -5818.9,2082.68 -5797.24,2061.02 D55.2@-5763.78,2061.02 ; v1(-5141.73,2240.16) -5141.73,2147.64 D56.2@-5055.12,2061.02 ; v1(-4385.83,2240.16) -4385.83,2124.38 -4322.47,2061.02 D57.2@-4319.12,2061.02 ; v1(-3572.83,2240.16) -3572.83,2094.49 D58.2@-3539.37,2061.02 ; v1(-2637.8,2240.16) -2637.8,2138.16 -2560.66,2061.02 D59.2@-2555.12,2061.02 ; v1(-1550.2,2039.37) -1550.2,2056.1 D60.2@-1545.28,2061.02 ; v1(-582.68,2045.28) -582.68,1881.89 D61.2@-545.28,1844.49 ; v1(389.76,2045.28) 395.67,2039.37 D62.2@395.67,2015.75 ; D63.2@1149.61,2027.56 D63.2@1149.61,2048.44 ; v1@1860.24,2033.46 D64.2@1903.54,2033.46
ROW5: D65.2 D66.2 D67.2 D68.2 D69.2 D70.2 D71.2 D72.2 D73.2 D74.2 D75.2 D76.2 D77.2 D78.2 D79.2 D80.2 IC1.28 | length 20869.5
  Top Layer w15.75: v1(-11881.89,1305.12) -11848.43,1338.58 -11702.76,1338.58 -11669.29,1305.12 -11508.39,1305.12 -11507.61,1304.34 -10211.4,1304.34 v1(-10210.63,1305.12) -10161.42,1354.33 -10023.62,1354.33 -9938.98,1269.69 -9852.12,1269.69 -9816.68,1234.25 -7720.47,1234.25 v1(-7696.85,1210.63) -7621.06,1134.84 -7621.06,1066.03 -7545.19,990.16 -7364.88,990.16 -7320.79,1034.24 v1(-7129.92,1034.24) -6719.28,1034.24 -6651.57,966.54 -5600.39,966.54 v1(-5588.58,978.35) ; v1(-4074.8,1279.53) -4018.9,1335.43 -3808.26,1335.43 -3743.42,1270.59 -3278.46,1270.59 -3072.83,1064.96 -2875.98,1064.96 -2767.72,956.69 -2507.87,956.69 -2352.36,1112.2 -2352.36,1267.72 ; v1@-2345.47,1274.61 -2281.5,1338.58 -2145.16,1338.58 -2080.2,1273.62 -1431.1,1273.62 -1305.12,1147.64 -1100.39,1147.64 -1070.09,1117.34 v1(-551.18,1117.34) -492.9,1117.34 -463,1147.23 -344.08,1147.23 -314.19,1117.34 v1(210.63,1117.34) 301.85,1117.34 331.75,1147.23 388.71,1147.23 421.77,1114.17 1042.07,1114.17 ; v1(-1289.37,1114.17) -1289.37,1145.67 ; v1(1042.07,1217.27) 1042.07,1114.17 ; v1(1964.57,3893.7) v1(2338.58,3893.7) 2826.77,3893.7 2852.36,3868.11 2852.36,3452.76 2665.35,3265.75 v1(2665.35,2846.46) 2838.58,2673.23 2838.58,1474.41 2692.91,1328.74 v1(2525.59,1328.74) ; v1@2517.72,1328.74 2464.57,1275.59 2155.51,1275.59 2090.55,1340.55 1982.28,1340.55 1929.13,1287.4 v1(1875.98,1287.4) 1875.98,1141.73 1734.25,1000 1566.93,1000 1504.84,1062.09 1172.17,1062.09 1120.08,1114.17 1042.07,1114.17
  Bottom Layer w10: D66.2@-11045.28,1271.65 v1@-11045.28,1301.18 ; D67.2@-10208.66,1271.65 v1@-10208.66,1303.15 ; D69.2@-4029.53,1279.53 D69.2@-4025.59,1283.46
  Bottom Layer w15.75: D65.2@-11881.89,1271.65 v1(-11881.89,1305.12) ; IC1.28@-7826.77,1253.94 -7740.16,1253.94 v1(-7696.85,1210.63) ; v1@-7127.95,1036.21 D68.2@-7127.95,1110.21 ; v1(-5588.58,978.35) -5492.13,1074.8 -4279.53,1074.8 v1(-4074.8,1279.53) ; v1@-4070.87,1283.46 D69.2@-4025.59,1283.46 ; v1(-3222.44,1216.54) -3220.47,1216.54 D70.2@-3153.54,1283.46 ; v1(-2352.36,1281.5) -2331.69,1281.5 D71.2@-2323.2,1281.5 ; D72.2@-1295.28,1076.77 v1@-1295.28,1108.27 ; D73.2@-549.21,1078.74 v1@-549.21,1115.37 ; D74.2@204.72,1078.74 v1@204.72,1111.43 ; v1@1046.75,1212.6 D75.2@1108.27,1212.6 ; D76.2@1868.11,1253.94 1875.98,1261.81 v1(1875.98,1287.4) ; v1(1964.57,3893.7) 2007.87,3893.7 D80.2@2009.84,3891.73 ; v1(2338.58,3893.7) 2639.76,3893.7 D79.2@2688.98,3942.91 ; v1(2525.59,1328.74) 2570.87,1374.02 D77.2@2578.74,1374.02 ; v1(2665.35,2846.46) D78.2@2704.72,2846.46
  other v1: -11041.34,1305.12
ROW6: D81.2 D82.2 D83.2 D84.2 D85.2 IC1.29 | length 17028.1
  Top Layer w15.75: v4(-11566,3776) -2479.91,3776 -2428.54,3724.63 -2254.63,3724.63 v4(-2240,3710) ; v1(-11218.5,1509.84) -11218.5,1460.63 -11187.01,1429.13 -9825.71,1429.13 -9820.6,1434.24 -9719.67,1434.24 -9543.31,1257.87 -7669.29,1257.87 -7639.76,1228.35 v1(-7639.76,1204.72)
  Bottom Layer w15.75: D81.2@-11868.11,3927.17 -11868.11,3776 ; -11856.3,2403.54 -11854.33,2405.51 D83.2@-11767.72,2405.51 ; D82.2@-11698.82,3187.01 -11862.2,3187.01 -11868.11,3181.1 ; v4(-11566,3776) -11868.11,3776 ; D84.2@-11492.13,1724.41 -11492.13,1812.83 -11512.4,1833.1 -11776.01,1833.1 -11868.11,1925.2 -11868.11,3181.1 ; D84.2@-11480.31,1724.41 -11480.31,1614.17 -11379.64,1513.5 -11222.16,1513.5 v1(-11218.5,1509.84) ; IC1.29@-7826.77,1222.44 -7757.87,1222.44 -7716.54,1181.1 -7651.57,1181.1 -7639.76,1192.91 v1(-7639.76,1204.72) ; v4(-2240,3710) D85.2@-2240,3920.47 ; -11868.11,3181.1 -11868.11,3776
"SCORLL LOCK": IC1.19 Q3.1 R3.1 | length 9649.9
  Top Layer w10: v1(-7501.97,2236.22) -7459.13,2279.06 -2499.98,2279.06 -2279.29,2499.75 -2052.61,2499.75 -1998.7,2445.85 -1998.7,2428.55 -1896.22,2326.06 -1533.99,2326.06 -1476.15,2383.9 -1456.34,2383.9 -1314.79,2525.45 -812.01,2525.45 -699.72,2413.17 -699.72,2408.7 -475.16,2184.13 218.17,2184.13 v1(248.61,2214.57)
  Bottom Layer w10: IC1.19@-7980.31,1470.47 -7980.31,1506.4 -7902.06,1584.65 -7630.23,1584.65 -7437.01,1777.87 -7437.01,1989.39 -7465.63,2018.01 -7465.63,2199.88 v1(-7501.97,2236.22) ; v1(248.61,2214.57) R3.1@248.61,2424.3 ; R3.1@249,2424.69 Q3.1@249,2506.9
VCC: C1.2 C2.2 C3.2 C4.2 C5.2 DA1.5 IC1.2 IC1.7 IC1.14 IC1.24 IC1.34 IC1.44 Q1.2 Q2.2 Q3.2 Q4.2 R1.2 R2.2 R3.2 R4.2 R40.2 U1.24 USB1.A4 USB1.A9 USB1.B4 USB1.B9 | length 18774.6
  Top Layer w15: v3(-6868.11,3033.46) -6845.47,3056.1 -6729.46,3056.1 -6728.54,3055.18 -6674.77,3055.18 -6673.85,3056.1 -5979.97,3056.1 -5979.05,3055.18 -5925.28,3055.18 -5924.36,3056.1 -5230.48,3056.1 -5229.56,3055.18 -5175.8,3055.18 -5174.87,3056.1 -3731.51,3056.1 -3730.58,3055.18 -3676.82,3055.18 -3675.9,3056.1 -2978.59,3056.1 -2977.67,3055.18 -2852.96,3055.18 -2798.5,3000.72 -2669.31,3000.72 -2411.09,2742.5 -1977.8,2742.5 -1760.9,2959.4 -1406.25,2959.4
  Top Layer w15.75: v4(-619.65,2643.05) -388.05,2643.05 -372.2,2658.9 -5.5,2658.9 24.41,2628.99 v4(24.41,2360.6) v4(173.8,2360.6) 224.32,2411.11 v4(224.32,2878.3)
  Top Layer w39.37: -7651.57,3033.46 v3(-6868.11,3033.46) ; v3(-7391.73,1236.22) v3@-7391.73,1391.73 ; v3@-7391.73,1395.67 -7334.65,1452.76 v3(-7334.65,1688.98) ; v3(-6651.57,1742.13) -6651.57,1470.47 -6566.93,1385.83 v3(-6566.93,1305.12) ; -1406.25,2959.4 -1119.58,2672.72 -762.46,2672.72 -732.78,2643.05 v4(-619.65,2643.05)
  Bottom Layer w10: C2.2@-8387.8,1139.76 -8375.98,1127.95 IC1.2@-8259.84,1127.95 -8216.54,1127.95 ; C1.2@-8387.8,1301.57 -8371.65,1285.43 IC1.7@-8259.84,1285.43 -8137.8,1285.43 ; R40.2@-8287.4,1625.23 -8282.71,1625.23 -8240.16,1582.68 -8196.85,1582.68 -8137.8,1523.62 IC1.14@-8137.8,1470.47 -8137.8,1285.43 ; C4.2@-8267.72,950.79 -8267.72,1011.81 -8242.13,1037.4 IC1.44@-8200.79,1037.4 -8200.79,1112.2 -8216.54,1127.95 ; C5.2@-7860.24,948.82 -7885.83,974.41 IC1.34@-7885.83,1037.4 -7885.83,1089.43 -7933.46,1137.06 -8137.8,1137.06 ; C3.2@-7675.2,1391.73 -7687.01,1379.92 IC1.24@-7826.77,1379.92 -7954.72,1379.92 -8049.21,1285.43 -8137.8,1285.43 ; USB1.B9@143.25,4500.13 143.25,4538.92 160.8,4556.47 307.71,4556.47 330.26,4533.91 USB1.A9@330.26,4500.13 ; -8216.54,1127.95 -8146.9,1127.95 -8137.8,1137.06 ; -8137.8,1137.06 -8137.8,1285.43
  Bottom Layer w15.75: C3.2@-7673.23,1389.76 C3.2@-7675.2,1391.73 v3(-7405.51,1391.73) ; v3(-6566.93,1305.12) -6433.07,1305.12 -6250,1122.05 U1.24@-6250,989.76 ; Q4.2@-526.94,2643.05 -500.85,2643.05 -483.27,2625.47 -483.27,2548.5 -442.91,2508.15 R4.2@-442.91,2460.63 R4.2@-433.16,2470.38 ; v4(24.41,2360.6) R2.2@24.41,2424.3 ; R2.2@24.8,2424.69 Q2.2@24.8,2506.9 ; v4(173.8,2360.6) R3.2@173.8,2424.3 ; R3.2@174.2,2424.69 Q3.2@174.2,2506.9 ; DA1.5@341.04,4255.91 369.59,4255.91
  Bottom Layer w23.62: 322.84,4411.41 326.77,4415.34 USB1.A9@326.77,4495.81
  Bottom Layer w39.37: -7649.61,3000 -7649.61,2370.08 -7594.33,2314.8 -7494.88,2314.8 -7433.07,2252.99 -7433.07,2031.5 -7334.65,1933.07 v3(-7334.65,1688.98) ; R1.2@-7449.95,1176.55 -7392.08,1176.55 ; v3@-7392.08,1235.87 -7392.08,1176.55 ; Q1.2@-7371.89,1088.91 -7392.08,1109.11 -7392.08,1176.55 ; v3(-6868.11,3033.46) -6905.51,2996.06 -6905.51,2299.21 -6651.57,2045.28 v3(-6651.57,1742.13) ; v4(-619.65,2643.05) Q4.2@-526.94,2643.05 ; v4(224.32,2878.3) 224.32,3710.54 369.59,3855.81 369.59,4255.91 369.59,4364.67 322.84,4411.41
  other v3: -7667.32,3017.72
pads on no net: B1.0 B2.0 B3.0 B4.0 B5.0 B6.0 B7.0 B8.0 B9.0 B10.0 B11.0 B12.0 B13.0 B14.0 B15.0 B16.0 B17.0 B18.0 B19.0 B20.0 B21.0 B22.0 B23.0 B24.0 B25.0 B26.0 B27.0 B28.0 B29.0 B30.0 B31.0 B32.0 B33.0 B34.0 B35.0 B36.0 B37.0 B38.0 B39.0 B40.0 B41.0 B42.0 B43.0 B44.0 B45.0 B46.0 B47.0 B48.0 B49.0 B50.0 B51.0 B52.0 B53.0 B54.0 B55.0 B56.0 B57.0 B58.0 B59.0 B59A.0 B60.0 B61.0 B62.0 B63.0 B64.0 B65.0 B66.0 B67.0 B68.0 B69.0 B70.0 B71.0 B72.0 B73.0 B74.0 B75.0 B76.0 B77.0 B78.0 B79.0 B80.0 B81.0 B82.0 B83.0 B83A.0 B84.0 B85.0 B86.0 DA1.3 DA1.4 IC1.1 IC1.8 IC1.11 IC1.20 IC1.36 IC1.37 IC1.38 IC1.39 IC1.40 IC1.41 IC1.42 USB1.20 USB1.A8 USB1.B5

## Polygon pours and split planes (outlines as drawn)
NetC6_2 on Bottom Layer "BottomLayer-No Net" (hatched 90Degree grid 3.94 track 3.94, remove dead copper, pour order 0): -8137.8,1716.54 -8102.36,1716.54 -8098.43,1716.54 -8098.43,1681.1 -8102.36,1677.17 -8106.3,1673.23 -8125.98,1673.23 -8137.8,1673.23 -8141.73,1677.17
no net on Bottom Solder "BottomLayer-No Net" (hatched 90Degree grid 3.94 track 3.94, remove dead copper): -8137.8,1716.54 -8102.36,1716.54 -8098.43,1716.54 -8098.43,1681.1 -8102.36,1677.17 -8106.3,1673.23 -8125.98,1673.23 -8137.8,1673.23 -8141.73,1677.17

## Keep-outs
Keep-Out Layer:
  circle w5: c-236.92,2456.18 r118.11
  lines w3.94: -11950.01,927.38 -11950.01,4407.27 ; -11950.01,931.6 ccw(c-11910.65,931.94) -11910.27,892.58 ; -11949.89,4403.87 cw(c-11910.53,4404.25) -11910.87,4443.62 ; -11915.09,892.46 -9245.8,892.46 ; -11913.67,4443.62 -2203.98,4443.62 ; -9245.72,892.11 cw(c-9246.06,852.74) -9206.69,852.36 ; -9206.83,832.84 ccw(c-9167.47,832.47) -9167.81,793.1 ; -9206.69,831.69 -9206.69,853.35 ; -9168.31,793.31 -8969.64,793.31 ; -8969.64,793.44 ccw(c-8969.98,832.81) -8930.61,833.19 ; -8930.75,832.04 -8930.75,853.69 ; -8930.75,852.71 cw(c-8891.39,853.09) -8891.73,892.46 -4743.02,892.46 ; -4743.02,892.11 cw(c-4743.37,852.74) -4704,852.36 ; -4704.14,832.84 ccw(c-4664.77,832.47) -4665.12,793.1 ; -4704,831.69 -4704,853.35 ; -4665.62,793.31 -4466.94,793.31 -4648.62,793.31 ; -4466.94,793.44 ccw(c-4467.29,832.81) -4427.92,833.19 ; -4428.06,832.04 -4428.06,853.69 ; -4428.06,852.71 cw(c-4388.69,853.09) -4389.04,892.46 ; -4389.76,892.46 -4389.76,891.73 -1303.15,891.73 ; -2203.58,4443.62 ccw(c-2203.79,4467.29) -2180.12,4467.52 ; -2180.12,4462.6 cw(c-2156.45,4462.83) -2156.66,4486.49 ; -2157.64,4486.22 -1913.06,4486.22 ; -1913.06,4486.49 cw(c-1913.27,4462.82) -1889.6,4462.59 ; -1889.6,4467.51 ccw(c-1865.93,4467.28) -1866.14,4443.62 -1266.73,4443.62 ccw(c-1266.94,4467.28) -1243.27,4467.51 ; -1302.54,891.82 cw(c-1302.16,852.45) -1262.8,852.8 ; -1262.6,744.99 ccw(c-1223.24,744.61) -1223.58,705.24 ; -1262.51,744.8 -1262.51,851.1 ; -1243.27,4462.59 cw(c-1219.6,4462.82) -1219.81,4486.49 ; -1222.67,704.96 751.22,704.96 ; -1219.81,4486.22 -972.59,4486.22 ; -972.59,4485.19 cw(c-972.8,4461.53) -949.13,4461.3 ; -949.13,4466.22 ccw(c-925.46,4465.99) -925.67,4442.32 53.15,4442.32 53.15,4768.7 ; 53.43,4766.19 cw(c92.8,4765.84) 93.18,4805.21 ; 89.57,4805.12 372.05,4805.12 ; 372.49,4804.84 cw(c372.14,4765.47) 411.51,4765.09 ; 411.42,4765.75 411.42,4443.62 3226.15,4443.62 3226.15,3689.8 ccw(c3249.81,3690.01) 3250.04,3666.34 ; 748.64,704.86 ccw(c749.02,744.23) 788.39,743.89 ; 788.67,742.41 788.67,853.63 ; 788.95,853.52 cw(c828.32,853.18) 828.7,892.55 ; 827.49,892.46 3229.94,892.46 ; 3187.01,4443.62 cw(c3186.66,4404.25) 3226.03,4403.87 ; 3226.15,1234.25 3226.15,1850.56 cw(c3249.82,1850.35) 3250.05,1874.02 ; 3226.14,1239.17 ccw(c3249.81,1239.38) 3250.04,1215.71 ; 3226.15,3352.36 cw(c3249.82,3352.15) 3250.05,3375.82 ; 3226.15,3360.24 3226.15,2734.25 ccw(c3249.81,2734.46) 3250.04,2710.79 ; 3229.94,892.08 ccw(c3230.32,931.45) 3269.68,931.1 3269.69,1192.25 ; 3245.12,1215.71 cw(c3245.35,1192.04) 3269.01,1192.25 ; 3245.12,1874.02 ccw(c3245.35,1897.68) 3269.02,1897.48 ; 3245.12,2164.53 cw(c3245.35,2140.86) 3269.01,2141.07 ; 3245.12,2420.28 ccw(c3245.35,2443.94) 3269.02,2443.74 ; 3245.12,2710.79 cw(c3245.35,2687.12) 3269.01,2687.33 ; 3245.12,3375.82 ccw(c3245.35,3399.49) 3269.02,3399.28 ; 3245.12,3666.34 cw(c3245.35,3642.67) 3269.01,3642.88 ; 3250.04,2164.53 cw(c3249.81,2188.2) 3226.14,2187.99 3226.15,2396.82 cw(c3249.82,2396.61) 3250.05,2420.28 ; 3269.69,1893.86 3269.69,2141.07 ; 3269.69,2440.12 3269.69,2687.33 ; 3269.69,3395.67 3269.69,3642.88

## Other copper
Top Layer:
  text "Keyboard-A" at -6025.59,1231 h118.11
  text "A1 2018.01.01" at -6075.64,1039.07 h118.11

## Silkscreen, mask and mechanical layers (free items; w line width, h text height)
Bottom Overlay:
  lines w3.94: -8116.14,1742.13 -8129.92,1728.35 -8145.67,1744.09 -8116.14,1744.09
Top Solder:
  text "Keyboard-A" at -6025.59,1231 h118.11
  text "A1 2018.01.01" at -6075.64,1039.07 h118.11